# EAGLE board Nusbio SPI Extension (EAGLE 9.6.2)

Size 54.03 x 65.02 mm. Coordinates in mm from the lower left corner, seen from the top.
Outline: 5,0 0,0 0,4
Outline: 49,0 54,0 54,5
Outline: 54,60 54,65 50,65
Outline: 6,65 0,65 0,60
Outline: 0,4 0,60
Outline: 0,60 arc-90 6,65
Outline: 6,65 50,65
Outline: 50,65 arc-90 54,60
Outline: 54,60 54,5
Outline: 54,5 arc-90 49,0
Outline: 49,0 5,0
Outline: 5,0 4,0 arc-90 0,4
Copper layers (1*16): Top 0.035mm / dielectric 1.5mm / Bottom 0.035mm
Design rules "default": minimum track width 10mil, minimum drill 24mil, track to track 8mil, track to pad 8mil, pad to pad 8mil, via to via 8mil, smd to smd 8mil, copper to edge 40mil, drill to drill 8mil, minimum pad ring 10mil, minimum via ring 8mil, stop-mask expansion 4mil, vias tented up to drill 0mil, thermal gap 10mil

## Footprints (pad centres in the part's own frame; a part is rotated, then mirrored left to right if it is on the bottom)
1X10-BIG = drill 1.016 pad 1.778 octagon: 1 -11.43,0; 2 -8.89,0; 3 -6.35,0; 4 -3.81,0; 5 -1.27,0; 6 1.27,0; 7 3.81,0; 8 6.35,0; 9 8.89,0; 10 11.43,0
1206 = smd 1.6 x 1.803: A -1.422,0; C 1.422,0
SOIC127P600X175-16N = smd 1.9 x 0.6: 1 -2.455,4.445; 2 -2.455,3.175; 3 -2.455,1.905; 4 -2.455,0.635; 5 -2.455,-0.635; 6 -2.455,-1.905; 7 -2.455,-3.175; 8 -2.455,-4.445; 9 2.455,-4.445; 10 2.455,-3.175; 11 2.455,-1.905; 12 2.455,-0.635; 13 2.455,0.635; 14 2.455,1.905; 15 2.455,3.175; 16 2.455,4.445
R1206 = smd 1.6 x 1.803: 1 -1.422,0; 2 1.422,0
SOIC8_208MIL = smd 0.6 x 2.2: 1 -1.905,-3.315; 2 -0.635,-3.315; 3 0.635,-3.315; 4 1.905,-3.315; 5 1.905,3.315; 6 0.635,3.315; 7 -0.635,3.315; 8 -1.905,3.315

## Placement (x,y rotation side)
ADC_IN_3_3V  PINHD-1X10  [1X10-BIG]  52,48 270 top
GPIO_IN  PINHD-1X10  [1X10-BIG]  27,2 180 top
GPIO_OUT_1  PINHD-1X10  [1X10-BIG]  27,63 0 top
GPIO_OUT_2  PINHD-1X10  [1X10-BIG]  52,19 270 top
GPIO_OUT_3  PINHD-1X10  [1X10-BIG]  2,30 90 top
LED_POWER  [1206]  27.42,25.46 180 top
MCP_3008_3_3V  MCP3008-I/SL  [SOIC127P600X175-16N]  35,37 0 top
R_4K  [R1206]  27.38,20.9 180 top
SOIC8_208MIL  [SOIC8_208MIL]  21.5,39.5 270 top

## Library data of the parts
ADC_IN_3_3V GPIO_IN GPIO_OUT_1-GPIO_OUT_3 LED_POWER R_4K = adafruit
MCP_3008_3_3V = MCP3008-I_SL; AVAILABILITY: In Stock; DESCRIPTION: 10 Bit Analog to Digital Converter 4, 8 Input 1 SAR 16-SOIC; MF: Microchip; MP: MCP3008-I/SL; PACKAGE: SOIC-16 Microchip; PRICE: None; PURCHASE-URL: https://pricing.snapeda.com/search/part/MCP3008-I/SL/?ref=eda
SOIC8_208MIL = microbuilder

## Nets
ADC0: ADC_IN_3_3V.1 MCP_3008_3_3V.1
ADC1: ADC_IN_3_3V.2 MCP_3008_3_3V.2
ADC2: ADC_IN_3_3V.3 MCP_3008_3_3V.3
ADC3: ADC_IN_3_3V.4 MCP_3008_3_3V.4
ADC4: ADC_IN_3_3V.5 MCP_3008_3_3V.5
ADC5: ADC_IN_3_3V.6 MCP_3008_3_3V.6
ADC6: ADC_IN_3_3V.7 MCP_3008_3_3V.7
ADC7: ADC_IN_3_3V.8 MCP_3008_3_3V.8
GND: ADC_IN_3_3V.10 GPIO_IN.10 GPIO_OUT_1.10 GPIO_OUT_2.10 GPIO_OUT_3.10 MCP_3008_3_3V.9 MCP_3008_3_3V.14 R_4K.1 SOIC8_208MIL.4
GPIO0: GPIO_IN.1 GPIO_OUT_1.1 GPIO_OUT_2.1 GPIO_OUT_3.1 MCP_3008_3_3V.13 SOIC8_208MIL.6
GPIO1: GPIO_IN.2 GPIO_OUT_1.2 GPIO_OUT_2.2 GPIO_OUT_3.2 MCP_3008_3_3V.11 SOIC8_208MIL.5
GPIO2: GPIO_IN.3 GPIO_OUT_1.3 GPIO_OUT_2.3 GPIO_OUT_3.3 MCP_3008_3_3V.12 SOIC8_208MIL.2
GPIO3: GPIO_IN.4 GPIO_OUT_1.4 GPIO_OUT_2.4 GPIO_OUT_3.4
GPIO4: GPIO_IN.5 GPIO_OUT_1.5 GPIO_OUT_2.5 GPIO_OUT_3.5
GPIO5: GPIO_IN.6 GPIO_OUT_1.6 GPIO_OUT_2.6 GPIO_OUT_3.6
GPIO6: GPIO_IN.7 GPIO_OUT_1.7 GPIO_OUT_2.7 GPIO_OUT_3.7 MCP_3008_3_3V.10
GPIO7: GPIO_IN.8 GPIO_OUT_1.8 GPIO_OUT_2.8 GPIO_OUT_3.8 SOIC8_208MIL.1
N$1: LED_POWER.C R_4K.2
VCC: ADC_IN_3_3V.9 GPIO_IN.9 GPIO_OUT_1.9 GPIO_OUT_2.9 GPIO_OUT_3.9 LED_POWER.A MCP_3008_3_3V.15 MCP_3008_3_3V.16 SOIC8_208MIL.3 SOIC8_208MIL.7 SOIC8_208MIL.8

## Tracks (layer width: path | path; a pad name or v marks a point on that pad's centre or on a via)
ADC0  (1 unrouted)
ADC1  (1 unrouted)
ADC2  (1 unrouted)
ADC3  (1 unrouted)
ADC4  (1 unrouted)
ADC5  (1 unrouted)
ADC6  (1 unrouted)
ADC7  (1 unrouted)
GND  (8 unrouted)
GPIO0  (5 unrouted)
GPIO1  (5 unrouted)
GPIO2  (5 unrouted)
GPIO3  (3 unrouted)
GPIO4  (3 unrouted)
GPIO5  (3 unrouted)
GPIO6  (4 unrouted)
GPIO7  (4 unrouted)
N$1  (1 unrouted)
VCC  (10 unrouted)

## Text on the board
tNames: G0 CLK | G1 MOSI | G2 MISO | CS 3 | CS 4 | CS 5 | CS 6 | CS 7 | VCC | GND | ADC 0 | ADC 1 | ADC 2 | ADC 3 | ADC 4 | ADC 5 | ADC 6 | ADC 7 | GND | VCC | VCC | GND | CS 7 | WINBOND_25Q128JV_16MB | CS 6 | CS 5 | G0 CLK | MCP 3008 | G1 MOSI | CS 4 | + | CS 3 | G2 MISO | CS 3 | G2 MISO | CS 4 | G1 MOSI | G0 CLK | CS 5 | CS 6 | CS 7 | VCC | GND | GND | VCC | CS 7 (FLASH) | CS 6 (ADC) | CS 5 | CS 4 | CS 3 | G2 MISO | G1 MOSI | G0 CLK | C:/DVT/Fred.PCB/2023/MadeInTheUSB.Logo.Gray.50.Small.bmp | C:/DVT/Fred.PCB/2023/MadeInTheUSB.Logo.Gray.50.bmp | C:/DVT/Fred.PCB/2023/MadeInTheUSB.Logo.Gray.50.bmp | C:/DVT/Fred.PCB/2023/Nusbio Flash Extension/MadeInTheUSB.Logo.Gray.bmp | C:/DVT/Fred.PCB/2023/Nusbio Flash Extension/Title.Logo.Gray.bmp | C:/DVT/Fred.PCB/2023/Nusbio SPI Extension/Title.Logo.Gray.bmp | C:/DVT/Fred.PCB/2023/Nusbio SPI Extension/Title.Logo.Gray.bmp
bNames: PCBv1 - 2023.04 | www.FredericTorres.com